# EAGLE board CANBus (EAGLE 9.1.3)

Size 160 x 100 mm. Coordinates in mm from the lower left corner, seen from the top.
Outline: 0,0 160,0 160,100 0,100 0,0
Copper layers (1*16): Top 0.035mm / dielectric 1.5mm / Bottom 0.035mm
Design rules "default": minimum track width 6mil, minimum drill 0.35mm, track to track 6mil, track to pad 6mil, pad to pad 6mil, via to via 6mil, smd to smd 6mil, copper to edge 40mil, drill to drill 6mil, minimum pad ring 10mil, minimum via ring 8mil, stop-mask expansion 4mil, vias tented up to drill 0mil, thermal gap 10mil

## Footprints (pad centres in the part's own frame; a part is rotated, then mirrored left to right if it is on the bottom)
C3216 = smd 1.6 x 1.8: 1 -1.651,0; 2 1.651,0
R3216 = smd 1.5 x 1.8: 1 -1.651,0; 2 1.651,0
SO08 = smd 0.6 x 1.2: 1 -1.905,-2.8; 2 -0.635,-2.8; 3 0.635,-2.8; 4 1.905,-2.8; 5 1.905,2.8; 6 0.635,2.8; 7 -0.635,2.8; 8 -1.905,2.8
2-SMD-5X3MM = smd 2 x 2.4: P$1 -2,0; P$2 2,0
SOP65P640X110-20N = smd 1.422 x 0.356: 1 -2.946,2.921; 2 -2.946,2.286; 3 -2.946,1.626; 4 -2.946,0.965; 5 -2.946,0.33; 6 -2.946,-0.33; 7 -2.946,-0.965; 8 -2.946,-1.626; 9 -2.946,-2.286; 10 -2.946,-2.921; 11 2.946,-2.921; 12 2.946,-2.286; 13 2.946,-1.626; 14 2.946,-0.965; 15 2.946,-0.33; 16 2.946,0.33; 17 2.946,0.965; 18 2.946,1.626; 19 2.946,2.286; 20 2.946,2.921

## Placement (x,y rotation side)
C1  [C3216]  -16.51,27.94 0 top  (outside the outline)
C2  [C3216]  -22.86,27.94 0 top  (outside the outline)
C3  [C3216]  -29.21,27.94 0 top  (outside the outline)
R1  [R3216]  -16.51,22.86 0 top  (outside the outline)
R2  [R3216]  -22.86,22.86 0 top  (outside the outline)
R3  [R3216]  -29.21,22.86 0 top  (outside the outline)
U2  MCP2551  [SO08]  -26.67,16.51 0 top  (outside the outline)
U$1  CRYSTAL  [2-SMD-5X3MM]  -19.05,16.51 0 top  (outside the outline)
U$2  MCP2515-I/ST  [SOP65P640X110-20N]  -39.37,7.62 0 top  (outside the outline)

## Library data of the parts
C1-C3 R1-R3 = rc-master-smd
U2 = SparkFun-IC-Comms; PROD_ID: IC-09907
U$1 = fab
U$2 = MCP2515-I_ST; AVAILABILITY: Unavailable; DESCRIPTION: MCP2515 Series 5.5 V 1 Mb/s Stand Alone SPI Interface CAN Controller- TSSOP-20; MF: Microchip; MP: MCP2515-I/ST; PACKAGE: TSSOP-20 Microchip; PRICE: None

## Nets
GND: C1.2 C2.2 C3.1 U2.2
N$1: C1.1 U$1.P$2 U$2.9
N$2: C2.1 U$1.P$1 U$2.8
N$7: U2.8
N$8: U2.7
N$9: U2.6
N$10: U2.5
N$11: U2.1
N$14: U2.4
VDD: C3.2 U2.3 U$2.20
VSS: U$2.10

## Tracks (layer width: path | path; a pad name or v marks a point on that pad's centre or on a via)
GND  (3 unrouted)
N$1  (2 unrouted)
N$2  (2 unrouted)
VDD  (2 unrouted)